# EAGLE board Robot_Psoc (EAGLE 7.6.0)
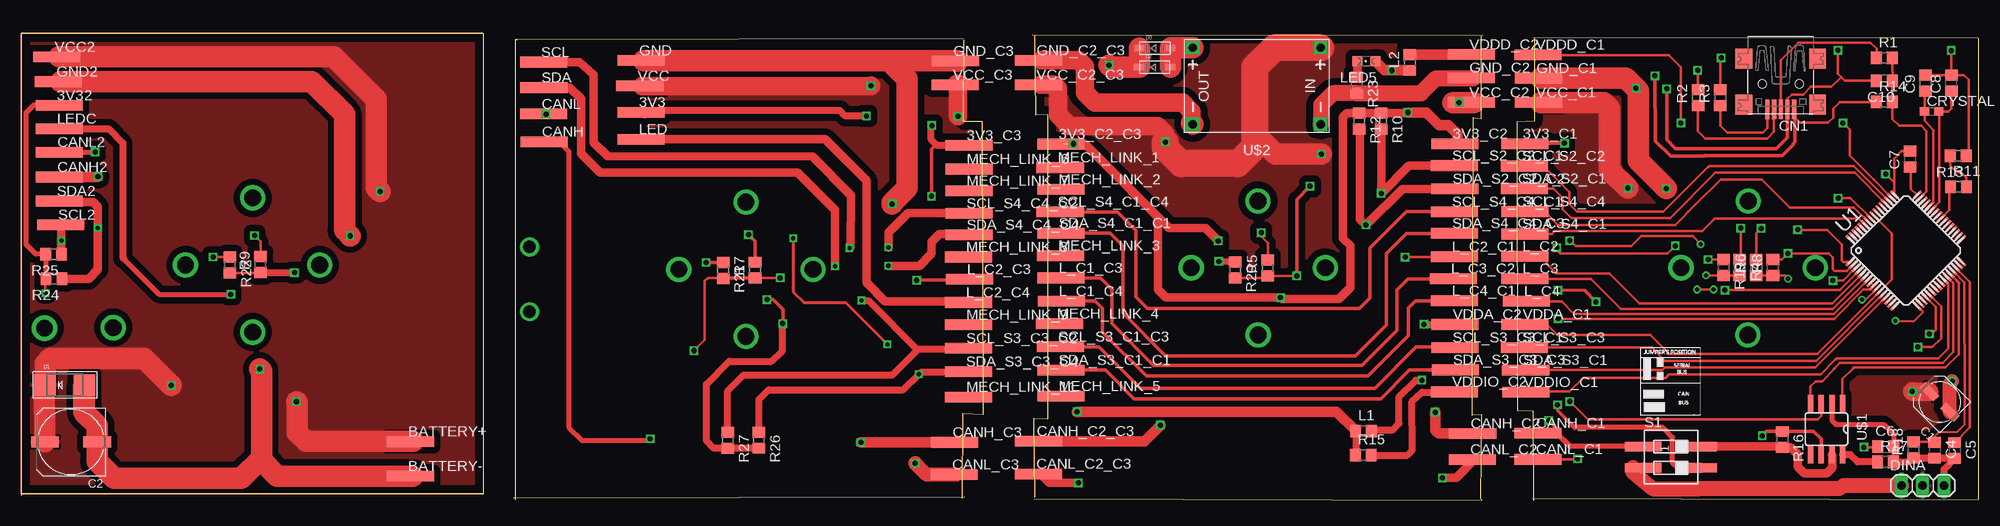
[diagram p0: board, top side]
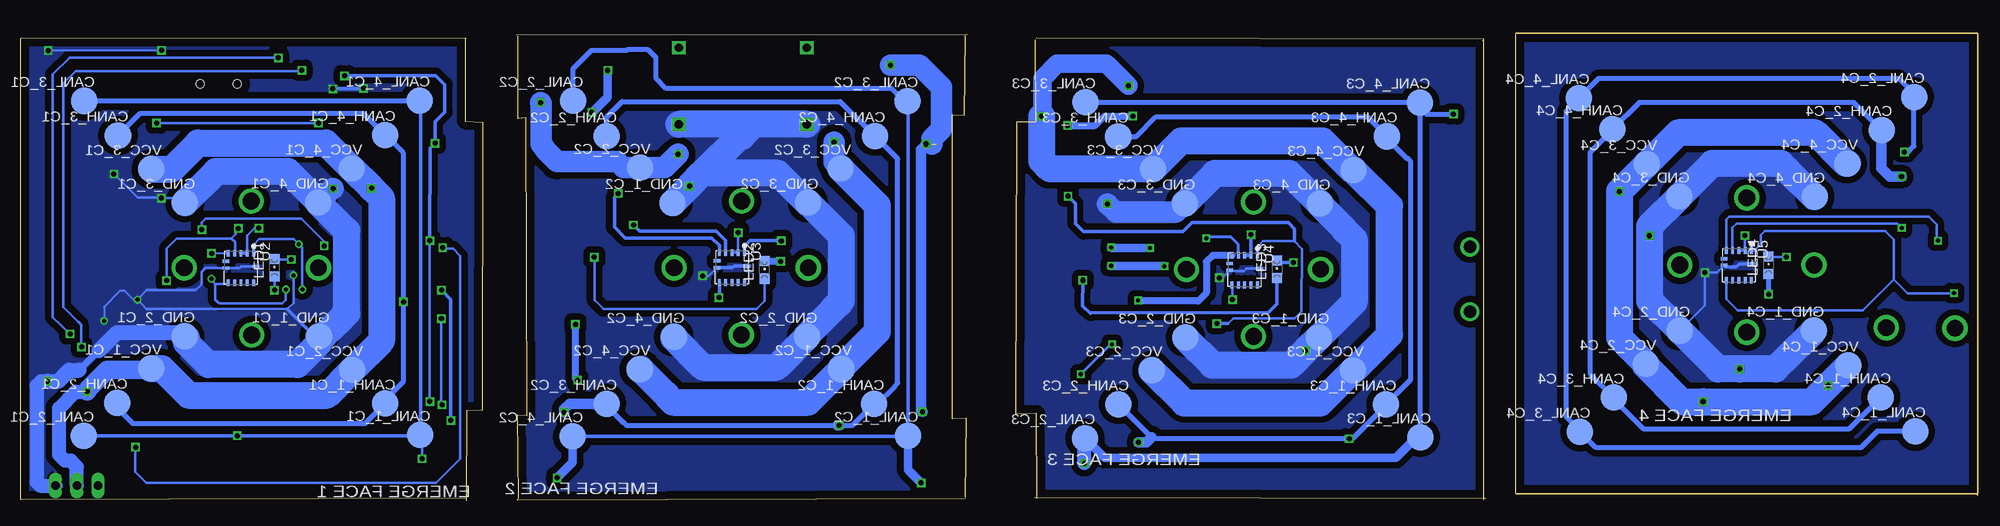
[diagram p1: board, bottom side, seen from below]

Size 233.48 x 55.82 mm. Coordinates in mm from the lower left corner, seen from the top.
Outline: 120.64,55.61 174.37,55.53
Outline: 112.44,55.01 112.4,45.25 114.65,45.24 114.75,10.31 112.3,10.39 112.28,0.29
Outline: 174.09,0.24 174.22,10.24 173.12,10.2 173.22,45.7 174.14,45.57 174.14,55.44
Outline: 120.84,55.49 120.94,46.04 122.4,46.1 122.4,9.76 120.75,9.84 120.86,0.38
Outline: 180.37,0 180.3,10.7 178.47,10.75 178.42,45.2 180.47,45.3 180.47,55.29
Outline: 0.01,0.55 0.01,55.55
Outline: 112.49,0.41 58.72,0.29
Outline: 112.33,55.19 58.97,55.08 58.97,0.08
Outline: 0,0.78 0,55.78
Outline: 233.37,55.26 180.34,55.2
Outline: 180.34,0.3 233.43,0.1
Outline: 233.48,0.17 233.48,55.17
Outline: 120.76,0.25 174.21,0.06 174.24,0.13
Outline: 59.12,54.99 59.01,54.99
Outline: 0.12,0.82 55.12,0.82 55.12,55.82 0.12,55.82
Outline: 55.01,0.82 0.01,0.82 0.01,55.82 55.01,55.82
Copper layers (1*16): Top 0.035mm / dielectric 1.5mm / Bottom 0.035mm
Design rules "default": minimum track width 10mil, minimum drill 24mil, track to track 8mil, track to pad 8mil, pad to pad 8mil, via to via 8mil, smd to smd 8mil, copper to edge 40mil, drill to drill 8mil, minimum pad ring 10mil, minimum via ring 8mil, stop-mask expansion 4mil, vias tented up to drill 0mil, thermal gap 10mil

## Footprints (pad centres in the part's own frame; a part is rotated, then mirrored left to right if it is on the bottom)
TP11R = smd 0.635 x 1.27: P$1 0.381,0; P$2 1.016,0; P$3 -0.254,0; P$4 -0.889,0; P$5 -1.524,0; P$6 1.613,0; P$7 2.21,0; P$8 -2.146,0; P$9 -2.769,0 | smd 1.1 x 1.1: TP 0,0
UD-5X5,8_NICHICON = smd 2.3 x 1: + 1.725,0; - -1.7,0
UD-8X10_NICHICON = smd 3.3 x 1.3: + 3.125,0; - -3.125,0
C0805 = smd 1.3 x 1.5: 1 -0.95,0; 2 0.95,0
B2,54 = smd 3.175 x 3.175 bottom: P$1 0,0 | smd 2.54 x 2.54 bottom: TP 0,0
USB-MINIB = smd 0.5 x 2.308: D+ 0,4.064; D- -0.8,4.064; GND 1.6,4.064; ID 0.8,4.064; VBUS -1.6,4.064 | smd 2 x 2.4: GND1 -4.4,-2; GND2 -4.4,3.5; GND3 4.4,3.5; GND4 4.4,-2 | hole 1: -2.2,1; 2.2,1
C0603 = smd 1.1 x 1: 1 -0.85,0; 2 0.85,0
SMADIODE = smd 2.54 x 2.54: A 2.349,0; C -2.349,0
SOD-123 = smd 1.2 x 0.7: A 1.85,0; C -1.85,0
1X03 = drill 1.016 long: 1 -2.54,0; 2 0,0; 3 2.54,0
R0805 = smd 1.3 x 1.5: 1 -0.95,0; 2 0.95,0
CHIPLED_0805 = smd 1.2 x 1.2: A 0,-1.05; C 0,1.05
SMS-002 = smd 1.092 x 2.007: 1 -1.27,-4.496; 2 1.27,-4.496; 3 1.27,4.496; 4 -1.27,4.496 | smd 1.143 x 2.54: P$1 -1.27,2.413; P$2 1.27,2.413; P$3 -1.27,-2.413; P$4 1.27,-2.413
TQFP64-10X10 = smd 1.2 x 0.3: 1 -5.7,3.75; 2 -5.7,3.25; 3 -5.7,2.75; 4 -5.7,2.25; 5 -5.7,1.75; 6 -5.7,1.25; 7 -5.7,0.75; 8 -5.7,0.25; 9 -5.7,-0.25; 10 -5.7,-0.75; 11 -5.7,-1.25; 12 -5.7,-1.75; 13 -5.7,-2.25; 14 -5.7,-2.75; 15 -5.7,-3.25; 16 -5.7,-3.75; 33 5.7,-3.75; 34 5.7,-3.25; 35 5.7,-2.75; 36 5.7,-2.25; 37 5.7,-1.75; 38 5.7,-1.25; 39 5.7,-0.75; 40 5.7,-0.25; 41 5.7,0.25; 42 5.7,0.75; 43 5.7,1.25; 44 5.7,1.75; 45 5.7,2.25; 46 5.7,2.75; 47 5.7,3.25; 48 5.7,3.75 | smd 0.3 x 1.2: 17 -3.75,-5.7; 18 -3.25,-5.7; 19 -2.75,-5.7; 20 -2.25,-5.7; 21 -1.75,-5.7; 22 -1.25,-5.7; 23 -0.75,-5.7; 24 -0.25,-5.7; 25 0.25,-5.7; 26 0.75,-5.7; 27 1.25,-5.7; 28 1.75,-5.7; 29 2.25,-5.7; 30 2.75,-5.7; 31 3.25,-5.7; 32 3.75,-5.7; 49 3.75,5.7; 50 3.25,5.7; 51 2.75,5.7; 52 2.25,5.7; 53 1.75,5.7; 54 1.25,5.7; 55 0.75,5.7; 56 0.25,5.7; 57 -0.25,5.7; 58 -0.75,5.7; 59 -1.25,5.7; 60 -1.75,5.7; 61 -2.25,5.7; 62 -2.75,5.7; 63 -3.25,5.7; 64 -3.75,5.7
XDCR_VCNL4010-GS08 = smd 0.805 x 0.35: 1 -1.772,1.5; 2 -1.772,0.75; 3 -1.772,0; 4 -1.772,-0.75; 5 -1.772,-1.5; 7 1.772,-1.5; 8 1.772,-0.75; 9 1.772,0; 10 1.772,0.75; 11 1.772,1.5 | smd 0.4 x 0.805: 6 -0.8,-1.772; 12 -0.175,1.772; 13 0,-1.772
SO8 = smd 0.66 x 2.032: 1 -1.905,-3.073; 2 -0.635,-3.073; 3 0.635,-3.073; 4 1.905,-3.073; 5 1.905,3.073; 6 0.635,3.073; 7 -0.635,3.073; 8 -1.905,3.073
DC-DC-STEP-DOWN-MP2307 = drill 1 pad 1.6 square: IN+ -7.62,-4.572; IN- -7.62,4.572; OUT+ 7.62,-4.572; OUT- 7.62,4.572

## Placement (x,y rotation side)
3V3  PTR1TP11R  [TP11R]  74.2,46.36 0 top
3V3_C1  PTR1TP11R  [TP11R]  179.65,42.6 0 top
3V3_C2  PTR1TP11R  [TP11R]  171.29,42.6 0 top
3V3_C2_C3  PTR1TP11R  [TP11R]  124.28,42.55 0 top
3V3_C3  PTR1TP11R  [TP11R]  113.3,42.39 0 top
3V32  PTR1TP11R  [TP11R]  4.77,47.17 0 top
BATTERY+  PTR1TP11R  [TP11R]  46.7,7.05 0 top
BATTERY-  PTR1TP11R  [TP11R]  46.68,2.91 0 top
C1  [UD-5X5,8_NICHICON]  228.85,11.76 135 top
C2  [UD-8X10_NICHICON]  5.91,7 180 top
C4  2200pF  [C0805]  228.24,6.02 270 top
C5  10nF  [C0805]  230.63,5.97 270 top
C6  1u  [C0805]  222.4,6.43 0 top
C7  1u  [C0805]  225.32,40.77 90 top
C8  36pF  [C0805]  230.25,49.84 90 top
C9  18pF  [C0805]  227.17,49.84 90 top
C10  0.1u  [C0805]  222.22,50.12 180 top
CANH  PTR1TP11R  [TP11R]  62.61,42.84 0 top
CANH2  PTR1TP11R  [TP11R]  4.79,38.61 0 top
CANH_1_C1  TPB2,54  [B2,54]  190.04,11.58 0 top
CANH_1_C2  TPB2,54  [B2,54]  131.73,11.53 0 top
CANH_1_C3  TPB2,54  [B2,54]  70.64,11.47 0 top
CANH_1_C4  TPB2,54  [B2,54]  11.62,12.33 0 top
CANH_2_C1  TPB2,54  [B2,54]  222,11.67 0 top
CANH_2_C2  TPB2,54  [B2,54]  163.62,43.48 0 top
CANH_2_C3  TPB2,54  [B2,54]  102.52,11.47 0 top
CANH_2_C4  TPB2,54  [B2,54]  11.48,44.25 0 top
CANH_3_C1  TPB2,54  [B2,54]  221.9,43.59 0 top
CANH_3_C2  TPB2,54  [B2,54]  163.62,11.55 0 top
CANH_3_C3  TPB2,54  [B2,54]  102.58,43.46 0 top
CANH_3_C4  TPB2,54  [B2,54]  43.44,12.3 0 top
CANH_4_C1  TPB2,54  [B2,54]  190.01,43.65 0 top
CANH_4_C2  TPB2,54  [B2,54]  131.6,43.52 0 top
CANH_4_C3  TPB2,54  [B2,54]  70.51,43.48 0 top
CANH_4_C4  TPB2,54  [B2,54]  43.61,44.33 0 top
CANH_C1  PTR1TP11R  [TP11R]  181.2,8.06 0 top
CANH_C2  PTR1TP11R  [TP11R]  173.4,8 0 top
CANH_C2_C3  PTR1TP11R  [TP11R]  121.64,7.09 0 top
CANH_C3  PTR1TP11R  [TP11R]  111.59,6.95 0 top
CANL  PTR1TP11R  [TP11R]  62.57,46.14 0 top
CANL2  PTR1TP11R  [TP11R]  4.8,41.59 0 top
CANL_1_C1  TPB2,54  [B2,54]  185.87,7.83 0 top
CANL_1_C2  TPB2,54  [B2,54]  127.66,7.73 0 top
CANL_1_C3  TPB2,54  [B2,54]  66.5,7.56 0 top
CANL_1_C4  TPB2,54  [B2,54]  7.48,8.27 0 top
CANL_2_C1  TPB2,54  [B2,54]  225.99,7.74 0 top
CANL_2_C2  TPB2,54  [B2,54]  167.63,47.73 0 top
CANL_2_C3  TPB2,54  [B2,54]  106.56,7.45 0 top
CANL_2_C4  TPB2,54  [B2,54]  7.6,48.19 0 top
CANL_3_C1  TPB2,54  [B2,54]  225.91,47.72 0 top
CANL_3_C2  TPB2,54  [B2,54]  127.68,47.68 0 top
CANL_3_C3  TPB2,54  [B2,54]  106.49,47.55 0 top
CANL_3_C4  TPB2,54  [B2,54]  47.48,8.21 0 top
CANL_4_C1  TPB2,54  [B2,54]  185.92,47.77 0 top
CANL_4_C2  TPB2,54  [B2,54]  167.65,7.66 0 top
CANL_4_C3  TPB2,54  [B2,54]  66.6,47.52 0 top
CANL_4_C4  TPB2,54  [B2,54]  47.6,48.06 0 top
CANL_C1  PTR1TP11R  [TP11R]  181.2,4.93 0 top
CANL_C2  PTR1TP11R  [TP11R]  173.35,4.91 0 top
CANL_C2_C3  PTR1TP11R  [TP11R]  121.59,3.18 0 top
CANL_C3  PTR1TP11R  [TP11R]  111.54,3.11 0 top
CN1  [USB-MINIB]  209.88,50.75 180 top
CRYSTAL  32.768kHz  [C0603]  227.88,46.46 0 top
D1  [SMADIODE]  5.17,13.8 0 top
D2  [SOD-123]  135.2,51.73 0 top
D3  [SOD-123]  135.23,54 0 top
DINA  [1X03]  226.82,1.78 0 top
GND  PTR1TP11R  [TP11R]  74.2,52.54 0 top
GND2  PTR1TP11R  [TP11R]  4.69,50.02 0 top
GND_1_C1  TPB2,54  [B2,54]  197.91,19.6 0 top
GND_1_C2  TPB2,54  [B2,54]  155.74,35.54 0 top
GND_1_C3  TPB2,54  [B2,54]  78.63,19.48 0 top
GND_1_C4  TPB2,54  [B2,54]  19.6,20.3 0 top
GND_2_C1  TPB2,54  [B2,54]  213.97,19.62 0 top
GND_2_C2  TPB2,54  [B2,54]  139.71,19.57 0 top
GND_2_C3  TPB2,54  [B2,54]  94.54,19.47 0 top
GND_2_C4  TPB2,54  [B2,54]  35.59,20.28 0 top
GND_3_C1  TPB2,54  [B2,54]  213.93,35.56 0 top
GND_3_C2  TPB2,54  [B2,54]  139.58,35.56 0 top
GND_3_C3  TPB2,54  [B2,54]  94.63,35.46 0 top
GND_3_C4  TPB2,54  [B2,54]  35.64,36.3 0 top
GND_4_C1  TPB2,54  [B2,54]  198.01,35.6 0 top
GND_4_C2  TPB2,54  [B2,54]  155.56,19.55 0 top
GND_4_C3  TPB2,54  [B2,54]  78.5,35.46 0 top
GND_4_C4  TPB2,54  [B2,54]  19.49,36.27 0 top
GND_C1  PTR1TP11R  [TP11R]  181.25,50.42 0 top
GND_C2  PTR1TP11R  [TP11R]  173.25,50.47 0 top
GND_C2_C3  PTR1TP11R  [TP11R]  121.61,52.56 0 top
GND_C3  PTR1TP11R  [TP11R]  111.69,52.47 0 top
L1  330-600Ohm@1Mhz  [R0805]  160.12,8.31 0 top
L2  330-600Ohm@1Mhz  [R0805]  165.63,52.3 90 top
L_C1_C3  PTR1TP11R  [TP11R]  124.3,26.57 0 top
L_C1_C4  PTR1TP11R  [TP11R]  124.33,23.8 0 top
L_C2  PTR1TP11R  [TP11R]  179.62,29.16 0 top
L_C2_C1  PTR1TP11R  [TP11R]  171.22,29.11 0 top
L_C2_C3  PTR1TP11R  [TP11R]  113.37,26.41 0 top
L_C2_C4  PTR1TP11R  [TP11R]  113.25,23.65 0 top
L_C3  PTR1TP11R  [TP11R]  179.65,26.5 0 top
L_C3_C2  PTR1TP11R  [TP11R]  171.12,26.5 0 top
L_C4  PTR1TP11R  [TP11R]  179.82,23.8 0 top
L_C4_C1  PTR1TP11R  [TP11R]  171.22,23.85 0 top
LED  PTR1TP11R  [TP11R]  74.2,43.14 0 top
LED1  [CHIPLED_0805]  203.22,27.79 0 bottom
LED2  [CHIPLED_0805]  144.78,27.54 0 bottom
LED3  [CHIPLED_0805]  83.63,27.61 0 bottom
LED4  [CHIPLED_0805]  25.01,28.11 0 bottom
LED5  [CHIPLED_0805]  160.45,52.45 90 top
LEDC  PTR1TP11R  [TP11R]  4.8,44.39 0 top
MECH_LINK_1  PTR1TP11R  [TP11R]  124.2,39.75 0 top
MECH_LINK_2  PTR1TP11R  [TP11R]  124.28,37.14 0 top
MECH_LINK_3  PTR1TP11R  [TP11R]  124.25,29.24 0 top
MECH_LINK_4  PTR1TP11R  [TP11R]  124.1,21.11 0 top
MECH_LINK_5  PTR1TP11R  [TP11R]  124.3,12.45 0 top
MECH_LINK_6  PTR1TP11R  [TP11R]  113.32,39.57 0 top
MECH_LINK_7  PTR1TP11R  [TP11R]  113.3,36.98 0 top
MECH_LINK_8  PTR1TP11R  [TP11R]  113.25,29.08 0 top
MECH_LINK_9  PTR1TP11R  [TP11R]  113.27,20.98 0 top
MECH_LINK_11  PTR1TP11R  [TP11R]  113.27,12.37 0 top
R1  0  [R0805]  222.22,52.84 0 top
R2  0  [R0805]  200,48.09 90 top
R3  0  [R0805]  202.66,48.11 90 top
R4  220  [R0805]  204.97,27.84 270 top
R5  220  [R0805]  148.69,27.77 90 top
R6  4.7k  [R0805]  206.96,27.84 90 top
R7  220  [R0805]  87.52,27.51 90 top
R8  4.7k  [R0805]  208.94,27.84 90 top
R9  220  [R0805]  28.51,28.19 90 top
R10  4.7k  [R0805]  162.22,45.32 270 top
R11  0  [R0805]  231.09,37.47 0 top
R12  4.7k  [R0805]  159.59,45.28 270 top
R13  0  [R0805]  231.06,41.15 180 top
R14  4.7k  [R0805]  222.25,47.58 0 top
R15  0  [R0805]  160.07,5.43 0 top
R16  120  [R0805]  210.06,7.29 270 top
R17  10k  [R0805]  222.37,4.63 0 top
R18  0  [R0805]  225.73,6.05 90 top
R19  220  [R0805]  203.04,27.84 270 top
R20  220  [R0805]  144.78,27.54 270 top
R21  220  [R0805]  83.71,27.48 270 top
R22  220  [R0805]  24.88,28.11 270 top
R23  220  [R0805]  159.31,49.57 270 top
R24  4.7k  [R0805]  3.88,26.48 180 top
R25  4.7k  [R0805]  3.82,29.41 180 top
R26  4.7k  [R0805]  87.98,7.22 270 top
R27  4.7k  [R0805]  84.26,7.21 270 top
S1  SWS002  [SMS-002]  196.78,5.19 270 top
SCL  PTR1TP11R  [TP11R]  62.55,52.33 0 top
SCL2  PTR1TP11R  [TP11R]  4.94,32.93 0 top
SCL_S2_C2  PTR1TP11R  [TP11R]  179.57,39.93 0 top
SCL_S2_C2_C1  PTR1TP11R  [TP11R]  171.24,39.98 0 top
SCL_S3_C1_C3  PTR1TP11R  [TP11R]  124.25,18.37 0 top
SCL_S3_C3  PTR1TP11R  [TP11R]  179.6,18.27 0 top
SCL_S3_C3_C1  PTR1TP11R  [TP11R]  171.29,18.27 0 top
SCL_S3_C3_C2  PTR1TP11R  [TP11R]  113.27,18.19 0 top
SCL_S4_C1_C4  PTR1TP11R  [TP11R]  124.2,34.47 0 top
SCL_S4_C4  PTR1TP11R  [TP11R]  179.62,34.5 0 top
SCL_S4_C4_C1  PTR1TP11R  [TP11R]  171.22,34.47 0 top
SCL_S4_C4_C2  PTR1TP11R  [TP11R]  113.3,34.29 0 top
SDA  PTR1TP11R  [TP11R]  62.6,49.3 0 top
SDA2  PTR1TP11R  [TP11R]  4.79,35.75 0 top
SDA_S2_C1  PTR1TP11R  [TP11R]  179.57,37.24 0 top
SDA_S2_C2_C2  PTR1TP11R  [TP11R]  171.29,37.21 0 top
SDA_S3_C1  PTR1TP11R  [TP11R]  179.72,15.57 0 top
SDA_S3_C1_C1  PTR1TP11R  [TP11R]  124.28,15.57 0 top
SDA_S3_C3_C3  PTR1TP11R  [TP11R]  171.34,15.6 0 top
SDA_S3_C3_C4  PTR1TP11R  [TP11R]  113.25,15.39 0 top
SDA_S4_C1  PTR1TP11R  [TP11R]  179.61,31.83 0 top
SDA_S4_C1_C1  PTR1TP11R  [TP11R]  124.3,31.93 0 top
SDA_S4_C4_C3  PTR1TP11R  [TP11R]  171.24,31.91 0 top
SDA_S4_C4_C4  PTR1TP11R  [TP11R]  113.32,31.72 0 top
U1  CY8C4247AZI-M485  [TQFP64-10X10]  224.81,29.85 45 top
U2  VCNL4010-GS08  [XDCR_VCNL4010-GS08]  207.23,27.77 270 bottom
U3  VCNL4010-GS08  [XDCR_VCNL4010-GS08]  148.66,27.82 270 bottom
U4  VCNL4010-GS08  [XDCR_VCNL4010-GS08]  87.49,27.51 270 bottom
U5  VCNL4010-GS08  [XDCR_VCNL4010-GS08]  28.54,28.09 270 bottom
U$1  SN65HVD230/1  [SO8]  215.34,8.54 180 top
U$2  DC-DC-STEP-DOWN-MP2307  [DC-DC-STEP-DOWN-MP2307]  147.37,49.49 180 top
VCC  PTR1TP11R  [TP11R]  74.05,49.5 0 top
VCC2  PTR1TP11R  [TP11R]  4.5,52.96 0 top
VCC_1_C1  TPB2,54  [B2,54]  217.94,15.77 0 top
VCC_1_C2  TPB2,54  [B2,54]  135.61,15.69 0 top
VCC_1_C3  TPB2,54  [B2,54]  74.56,15.54 0 top
VCC_1_C4  TPB2,54  [B2,54]  15.5,16.13 0 top
VCC_2_C1  TPB2,54  [B2,54]  193.94,15.6 0 top
VCC_2_C2  TPB2,54  [B2,54]  159.62,39.73 0 top
VCC_2_C3  TPB2,54  [B2,54]  98.56,15.55 0 top
VCC_2_C4  TPB2,54  [B2,54]  39.64,16.31 0 top
VCC_3_C1  TPB2,54  [B2,54]  217.94,39.59 0 top
VCC_3_C2  TPB2,54  [B2,54]  135.69,39.64 0 top
VCC_3_C3  TPB2,54  [B2,54]  98.43,39.59 0 top
VCC_3_C4  TPB2,54  [B2,54]  39.53,40.18 0 top
VCC_4_C1  TPB2,54  [B2,54]  194.01,39.64 0 top
VCC_4_C2  TPB2,54  [B2,54]  159.65,15.67 0 top
VCC_4_C3  TPB2,54  [B2,54]  74.5,39.47 0 top
VCC_4_C4  TPB2,54  [B2,54]  15.58,40.24 0 top
VCC_C1  PTR1TP11R  [TP11R]  181.25,47.53 0 top
VCC_C2  PTR1TP11R  [TP11R]  173.27,47.53 0 top
VCC_C2_C3  PTR1TP11R  [TP11R]  121.61,49.64 0 top
VCC_C3  PTR1TP11R  [TP11R]  111.66,49.62 0 top
VDDA_C1  PTR1TP11R  [TP11R]  179.63,21.03 0 top
VDDA_C2  PTR1TP11R  [TP11R]  171.29,21.03 0 top
VDDD_C1  PTR1TP11R  [TP11R]  181.2,53.22 0 top
VDDD_C2  PTR1TP11R  [TP11R]  173.27,53.24 0 top
VDDIO_C1  PTR1TP11R  [TP11R]  179.75,12.93 0 top
VDDIO_C2  PTR1TP11R  [TP11R]  171.22,12.98 0 top

## Library data of the parts
3V3 3V3_C1 3V3_C2 3V3_C2_C3 3V3_C3 3V32 BATTERY+ BATTERY- CANH CANH2 CANH_1_C1-CANH_1_C4 CANH_2_C1-CANH_2_C4 CANH_3_C1-CANH_3_C4 CANH_4_C1-CANH_4_C4 CANH_C1 CANH_C2 CANH_C2_C3 CANH_C3 CANL CANL2 CANL_1_C1-CANL_1_C4 CANL_2_C1-CANL_2_C4 CANL_3_C1-CANL_3_C4 CANL_4_C1-CANL_4_C4 CANL_C1 CANL_C2 CANL_C2_C3 CANL_C3 GND GND2 GND_1_C1-GND_1_C4 GND_2_C1-GND_2_C4 GND_3_C1-GND_3_C4 GND_4_C1-GND_4_C4 GND_C1 GND_C2 GND_C2_C3 GND_C3 L_C1_C3 L_C1_C4 L_C2 L_C2_C1 L_C2_C3 L_C2_C4 L_C3 L_C3_C2 L_C4 L_C4_C1 LED LEDC MECH_LINK_1-MECH_LINK_9 MECH_LINK_11 SCL SCL2 SCL_S2_C2 SCL_S2_C2_C1 SCL_S3_C1_C3 SCL_S3_C3 SCL_S3_C3_C1 SCL_S3_C3_C2 SCL_S4_C1_C4 SCL_S4_C4 SCL_S4_C4_C1 SCL_S4_C4_C2 SDA SDA2 SDA_S2_C1 SDA_S2_C2_C2 SDA_S3_C1 SDA_S3_C1_C1 SDA_S3_C3_C3 SDA_S3_C3_C4 SDA_S4_C1 SDA_S4_C1_C1 SDA_S4_C4_C3 SDA_S4_C4_C4 VCC VCC2 VCC_1_C1-VCC_1_C4 VCC_2_C1-VCC_2_C4 VCC_3_C1-VCC_3_C4 VCC_4_C1-VCC_4_C4 VCC_C1 VCC_C2 VCC_C2_C3 VCC_C3 VDDA_C1 VDDA_C2 VDDD_C1 VDDD_C2 VDDIO_C1 VDDIO_C2 = testpad
C1 C2 C4-C10 CRYSTAL L1 L2 R1-R27 = rcl
CN1 D1-D3 LED1-LED5 = adafruit
DINA = pinhead
S1 = smd-special
U1 = CypressPSoC
U2-U5 = VCNL4010-GS08
U$1 = texas_instruments
U$2 = diy-modules

## Nets
3V3_C1: 3V3_C1.TP CN1.VBUS R6.1 R8.1 R14.1 U2.1 U2.7 U$1.3
3V3_C2: 3V3_C2.TP 3V3_C2_C3.TP D2.C D3.C L1.1 L2.1 LED5.A R10.1 R12.1 R15.1 U3.1 U3.7
3V3_C3: 3V3.TP 3V3_C3.TP R26.2 R27.2 U4.1 U4.7
3V3_C4: 3V32.TP R24.2 R25.2 U5.1 U5.7
CAN_RX: U1.27 U$1.4
CAN_TX: U1.28 U$1.1
CANH: CANH_1_C1.TP CANH_2_C1.TP CANH_3_C1.TP CANH_4_C1.TP CANH_C1.TP S1.1
CANH_C3: CANH.TP CANH_1_C3.TP CANH_2_C3.TP CANH_3_C3.TP CANH_4_C3.TP CANH_C3.TP
CANH_C4: CANH2.TP CANH_1_C4.TP CANH_2_C4.TP CANH_3_C4.TP CANH_4_C4.TP
CANL: CANL_1_C1.TP CANL_2_C1.TP CANL_3_C1.TP CANL_4_C1.TP CANL_C1.TP R16.1 U$1.6
CANL_C3: CANL.TP CANL_1_C3.TP CANL_2_C3.TP CANL_3_C3.TP CANL_4_C3.TP CANL_C3.TP
CANL_C4: CANL2.TP CANL_1_C4.TP CANL_2_C4.TP CANL_3_C4.TP CANL_4_C4.TP
CMOD: C4.1 R18.2 U1.29
CTANK: C5.1 U1.30
DN_1: DINA.1 S1.2
GND3: GND.TP GND_1_C3.TP GND_2_C3.TP GND_3_C3.TP GND_4_C3.TP GND_C3.TP R7.1 R21.2 U4.12 U4.13
GND4: BATTERY-.TP C2.- D1.A GND2.TP GND_1_C4.TP GND_2_C4.TP GND_3_C4.TP GND_4_C4.TP R9.1 R22.2 U5.12 U5.13
GND_C1: C1.- C4.2 C5.2 C6.2 C7.2 C8.2 C9.2 C10.2 CN1.D- DINA.3 GND_1_C1.TP GND_2_C1.TP GND_3_C1.TP GND_4_C1.TP GND_C1.TP R4.2 R13.1 R17.2 R18.1 R19.2 U1.10 U1.17 U1.49 U1.57 U2.12 U2.13 U$1.2
GND_C2: GND_1_C2.TP GND_2_C2.TP GND_3_C2.TP GND_4_C2.TP GND_C2.TP GND_C2_C3.TP R5.1 R20.2 R23.2 U3.12 U3.13 U$2.IN- U$2.OUT-
LED_S1: LED1.A U1.4
LED_S2: L_C2.TP U1.5
LED_S2_C2: L_C2_C1.TP LED2.A
LED_S3: L_C3.TP U1.6
LED_S3_C3: L_C2_C3.TP LED3.A
LED_S4: L_C4.TP U1.7
LED_S4_C4: LED4.A LEDC.TP
LED_T_S4: L_C2_C4.TP LED.TP
MOTOR: S1.3 U1.8 U1.9
N$1: CN1.D+ R1.1
N$2: CN1.ID R2.1
N$3: CN1.GND R3.1
N$4: R11.2 R13.2
N$5: R16.2 S1.4 U$1.7
N$7: CANH_1_C2.TP CANH_2_C2.TP CANH_3_C2.TP CANH_4_C2.TP CANH_C2.TP CANH_C2_C3.TP
N$8: R7.2 U4.2 U4.3
N$9: R17.1 U$1.8
N$10: SDA_S3_C1_C1.TP SDA_S3_C3_C3.TP
N$14: LED1.C R19.1
N$15: LED2.C R20.1
N$16: LED3.C R21.1
N$17: LED4.C R22.1
N$18: LED5.C R23.1
N$20: L_C1_C4.TP L_C4_C1.TP
N$21: R4.1 U2.2 U2.3
N$22: L_C1_C3.TP L_C3_C2.TP
N$24: D2.A D3.A U$2.OUT+
N$26: SCL_S3_C1_C3.TP SCL_S3_C3_C1.TP
N$27: SCL_S4_C1_C4.TP SCL_S4_C4_C1.TP
N$32: CANL_1_C2.TP CANL_2_C2.TP CANL_3_C2.TP CANL_4_C2.TP CANL_C2.TP CANL_C2_C3.TP
N$43: R5.2 U3.2 U3.3
N$44: SDA_S4_C1_C1.TP SDA_S4_C4_C3.TP
N$46: R9.2 U5.2 U5.3
P0_1: R11.1 U1.40
P0_4: C8.1 CRYSTAL.2 U1.43
P0_5: C9.1 CRYSTAL.1 U1.44
SAR_BY: C6.1 U1.1
SCL_S1: R8.2 U1.2 U2.5
SCL_S2: SCL_S2_C2.TP U1.51
SCL_S2_U: R10.2 SCL_S2_C2_C1.TP U3.5
SCL_S3: SCL_S3_C3.TP U1.12
SCL_S3_U: R27.1 SCL_S3_C3_C2.TP U4.5
SCL_S4: SCL_S4_C4.TP U1.58
SCL_S4_U: SCL.TP SCL_S4_C4_C2.TP
SCL_S4_U_1: R25.1 SCL2.TP U5.5
SDA_S1: R6.2 U1.3 U2.4
SDA_S2: SDA_S2_C1.TP U1.52
SDA_S2_U: R12.2 SDA_S2_C2_C2.TP U3.4
SDA_S3: SDA_S3_C1.TP U1.13
SDA_S3_U: R26.1 SDA_S3_C3_C4.TP U4.4
SDA_S4: SDA_S4_C1.TP U1.59
SDA_S4_U: SDA.TP SDA_S4_C4_C4.TP
SDA_S4_U_1: R24.1 SDA2.TP U5.4
SWDCLK: R2.2 U1.21
SWDIO: R3.2 U1.20
UART_RX: U1.37
UART_TX: U1.38
VCC_C2: U$2.IN+ VCC_1_C2.TP VCC_2_C2.TP VCC_3_C2.TP VCC_4_C2.TP VCC_C2.TP VCC_C2_C3.TP
VCC_C3: VCC.TP VCC_1_C3.TP VCC_2_C3.TP VCC_3_C3.TP VCC_4_C3.TP VCC_C3.TP
VCC_C4: BATTERY+.TP C2.+ D1.C VCC2.TP VCC_1_C4.TP VCC_2_C4.TP VCC_3_C4.TP VCC_4_C4.TP
VCCC: C1.+ DINA.2 VCC_1_C1.TP VCC_2_C1.TP VCC_3_C1.TP VCC_4_C1.TP VCC_C1.TP
VCCD: C7.1 U1.48
VDDA: U1.11 U1.56 VDDA_C1.TP
VDDA2: L1.2 VDDA_C2.TP
VDDD: U1.50 VDDD_C1.TP
VDDD2: L2.2 VDDD_C2.TP
VDDIO: U1.26 VDDIO_C1.TP
VDDIO2: R15.2 VDDIO_C2.TP
XRES: C10.1 R1.2 R14.2 U1.47

## Tracks (layer width: path | path; a pad name or v marks a point on that pad's centre or on a via)
3V3_C1  (via drill 0.5, 0.6)
  Top 0.27: R8.1 210.36,26.89 v210.75,26.49 | v199.9,25.2 v201.87,25.2
  Top 0.305: 221.31,47.57 R14.1 216.94,47.58 216.14,46.79 216.14,45.73 215.51,45.1 212.18,45.1 211.54,45.74 | R6.1 R8.1 | v184.08,42.67 182.35,42.67 182.33,42.66 | U$1.3 214.7,10.12 214.28,9.69 186.88,9.68 v184.7,11.82 | v184.71,31.03 184.68,31.09 184.71,31.09 185.41,30.39 192.08,30.39 193.25,31.56 199.36,31.56 v200.34,30.59
  Top 0.406: 221.33,47.54 R14.1 | CN1.VBUS 211.54,46.62 211.54,45.74 211.54,42.77 211.41,42.63 211.41,42.5 210.08,41.17 200.79,41.17 200.74,41.13 196.78,41.13 194.91,42.9 v194.87,50.71
  Top 0.5: v184.08,42.67 182.33,42.66 179.48,42.61 3V3_C1.TP
  Bottom 0.27: v210.75,26.49 210.75,26.32 210.29,25.85 | 210.29,25.85 208.88,25.85 U2.7 | U2.1 205.74,30.51 205.04,31.21 200.96,31.21 | 200.96,31.21 199.93,30.19 199.93,25.49 v199.9,25.2 | v201.87,25.2 201.88,23.93 202.3,23.52 209.75,23.52 210.29,23.93 210.29,25.85 | 200.96,31.21 v200.34,30.59
  Bottom 0.305: 184.67,42.08 v184.08,42.67 | v184.7,11.82 184.69,30.49 v184.71,31.03
  Bottom 0.406: v184.71,31.03 184.67,42.08 | v184.08,42.67 184.08,45.22 182.93,46.37 182.93,49.66 184.02,50.75 v194.87,50.71
3V3_C2  (via drill 0.6)  (1 unrouted)
  Top 0.813: L1.1 159.17,5.34 R15.1
  Top 1.016: 135.58,33.84 135.58,25.18 136.52,24.24 v150.21,24.24 150.35,24.09 157.19,24.09 158.52,25.42 158.52,30.46 157.66,31.31 157.66,45.75 158.15,46.23 R12.1 162.19,46.23 R10.1 165.31,46.27 v165.39,46.34 | 135.58,33.84 133.17,36.25 | 135.58,33.84 136.9,32.52 141.25,32.52 v142.77,30.99 | 125.82,42.55 126.87,42.55 133.17,36.25 | 133.17,36.25 133.13,36.25 132.5,36.88 132.45,36.88 132.4,36.93
  Top 1.27: 3V3_C2.TP 171.29,43.75 170.22,44.82 169.11,44.82 167.63,46.3 165.45,46.3 v165.39,46.34 | L2.1 v163.48,51.35 162.6,51.35 LED5.A | L1.1 156.88,10.6 v125.93,10.6 | v125.49,42.59 125.82,42.55
  Top 2.54: D3.C 133.38,51.76 D2.C 130.04,51.73 v129.76,52.01
  Bottom 0.406: U3.7 150.16,24.28 v150.21,24.24 | U3.1 147.16,30.36 146.48,31.04 142.82,31.04 v142.77,30.99
  Bottom 1.016: v165.39,46.34 165.26,46.39 163.48,48.17 v163.48,51.35
  Bottom 1.27: v125.93,10.6 126.1,10.77 126.1,41.87 125.42,42.55 124.78,42.55 v125.49,42.59
  Bottom 2.54: 124.78,42.55 124.78,43.19 123.64,44.34 123.64,49.38 126.26,52.01 v129.76,52.01
3V3_C3  (via drill 0.6)
  Top 0.406: v88.94,23.98 89.67,23.98 90.84,22.82 90.84,21.15 v90.81,21.12 | v108.56,36.34 108.56,41.95 109.11,42.5
  Top 0.813: R26.2 R27.2 | R26.2 82.59,6.27 81.72,7.14 81.72,13.9 84.42,16.64 89.48,16.64 90.78,17.89 90.78,20.68 v90.81,21.12 | 87.75,6.04 R26.2 | 3V3_C3.TP 109.22,42.39 109.11,42.5 108.52,43.09 108.52,44.69 v108.61,44.78 | v100.82,45.92 98.27,45.92 97.63,46.56 74.4,46.56 3V3.TP
  Top 1.27: 74.34,46.23 3V3.TP
  Bottom 0.305: U4.1 85.99,30.28 85.31,30.96 81.55,30.96 80.67,30.05 80.71,23.02 80.71,22.58 81.56,21.74 88.86,21.74 89.47,21.12 | v88.94,23.98 88.94,25.68 U4.7
  Bottom 0.406: 81.55,30.96 81.55,32.43 82.3,33.18 93.76,33.18 94.85,32.09 106.7,32.09 107.7,33.1 107.7,35.47 v108.56,36.34 | v90.81,21.12 89.47,21.12
  Bottom 0.813: v108.61,44.78 105.33,44.78 104.24,45.87 100.86,45.87 v100.82,45.92
3V3_C4  (via drill 0.5)
  Top 0.305: v2.87,24.77 2.87,26.42 R24.2
  Top 0.61: 2.87,26.54 R25.2 1.73,29.41 0.55,30.59 0.55,46.3 1.5,47.25 4.7,47.25
  Top 1.016: 2.87,26.54 R24.2 | 4.7,47.25 3V32.TP
  Bottom 0.305: U5.1 26.66,29.86 25.91,30.61 25.91,31.69 25.44,32.17 11.06,32.17 10.04,31.15 10.04,26.41 | 10.04,26.41 8.36,24.73 2.9,24.73 v2.87,24.77 | U5.7 30.04,24.08 28.66,22.7 13.76,22.7 10.04,26.41
CAN_RX
  Top 0.27: 216.31,15.75 216.22,15.72 216.91,16.41 229.18,16.44 230.46,17.72 230.46,25.98 230.4,26.04
  Top 0.28: U$1.4 213.43,13.62 214.07,14.26 214.81,14.26 216.31,15.75
  Top 0.305: U1.27 229.73,26.66 229.78,26.66 230.4,26.04 | 213.51,11.69 U$1.4
CAN_TX
  Top 0.27: U$1.1 217.24,14.52 218.45,15.73 218.47,15.73 218.61,15.87 229.52,15.87 231.13,17.48 231.13,25.99 230.75,26.37
  Top 0.305: U1.28 230.75,26.37 231.16,25.96
CANH  (via drill 0.6)
  Top 0.406: S1.1 184.55,6.46 182.94,8.06 181.21,8.06 CANH_C1.TP | 183.13,8.08 183.13,8.63 v182.2,9.56 | v183.3,25.12 186.52,25.08 v187.83,23.72
  Top 0.61: S1.1 184.76,6.46 183.13,8.08
  Bottom 0.406: v182.2,9.56 182.2,24.02 v183.3,25.12
  Bottom 0.61: CANH_2_C1.TP 222,11.08 220.13,9.21 192.4,9.21 CANH_1_C1.TP 190.04,12.01 187.83,14.21 v187.83,23.72 187.83,41.47 CANH_4_C1.TP 190.05,43.65 192.59,46.19 219.3,46.19 CANH_3_C1.TP
CANH_C3  (via drill 0.6)
  Top 0.61: CANH.TP 64.15,42.84 65.3,41.68 65.3,8.75 66.87,7.17 74.82,7.17 v75.01,7.37
  Top 1.27: CANH_C3.TP v100.14,6.95
  Bottom 0.61: CANH_3_C3.TP 100.42,43.46 98.05,45.83 72.85,45.83 CANH_4_C3.TP 70.51,43.22 68.12,40.83 67.99,40.83 67.73,40.57 67.73,14.38 CANH_1_C3.TP 70.64,11.35 74.62,7.37 v75.01,7.37 98.42,7.37 98.61,7.56 CANH_2_C3.TP
  Bottom 1.27: v100.14,6.95 99.22,6.95 98.61,7.56
CANH_C4  (via drill 0.6)
  Top 1.27: CANH2.TP 9.04,38.61 v9.13,38.7
  Bottom 0.61: CANH_2_C4.TP 11.54,44.25 14.81,47.53 40.41,47.53 CANH_4_C4.TP 43.61,44.24 46.29,41.56 46.29,15.15 CANH_3_C4.TP 43.44,12.08 39.95,8.59 15.36,8.59 CANH_1_C4.TP
  Bottom 1.27: v9.13,38.7 10.55,38.7 11.53,39.68 11.53,44.2 CANH_2_C4.TP
CANL  (via drill 0.6)
  Top 0.305: CANL_C1.TP 185.59,4.93 v185.64,4.99
  Top 0.406: v207.68,7.74 208.17,8.24 R16.1 210.12,8.3 213.75,8.3 214.7,7.35 U$1.6
  Bottom 0.305: v185.64,4.99 185.64,6.9 186.12,7.39
  Bottom 0.406: CANL_2_C1.TP v207.68,7.74 186.48,7.74 | 186.48,7.74 185.81,8.41 | 185.81,8.41 185.81,7.89 CANL_1_C1.TP | 185.81,8.41 185.81,47.66 CANL_4_C1.TP | 185.69,6.96 186.12,7.39 186.48,7.74
  Bottom 0.61: CANL_3_C1.TP 185.97,47.72 CANL_4_C1.TP
CANL_C3  (via drill 0.6)
  Top 0.61: CANL.TP 63.94,46.14 64.02,46.23 62.66,46.23 CANL.TP
  Top 1.676: CANL_C3.TP 107.97,3.11 v106.62,4.45
  Bottom 0.61: CANL_3_C3.TP 66.63,47.55 CANL_4_C3.TP | CANL_4_C3.TP 66.6,7.65 CANL_1_C3.TP | 106.46,7.56 CANL_2_C3.TP | CANL_4_C3.TP 66.6,46.94 65.77,46.11 62.6,46.11 CANL.TP
  Bottom 1.016: CANL_1_C3.TP 67.01,7.56 69.43,5.13 104.24,5.13 CANL_2_C3.TP
  Bottom 1.676: v106.62,4.45 106.62,7.39 CANL_2_C3.TP
  other vias: 62.57,46.14
CANL_C4  (via drill 0.6)
  Top 0.61: CANL2.TP 8.74,41.59 v8.78,41.63
  Bottom 0.61: CANL_1_C4.TP 12.03,8.27 13.97,6.33 45.59,6.33 CANL_3_C4.TP 47.48,8.31 49.14,9.97 49.14,46.52 CANL_4_C4.TP 45.27,50.39 9.44,50.39 7.6,48.55 CANL_2_C4.TP 7.64,48.15 7.64,42.31 8.32,41.63 v8.78,41.63
CMOD
  Top 0.25: C4.1 228.24,7.67 228.79,8.21 230.94,8.21 231.85,9.12 231.85,11.45 231.83,11.47
  Top 0.305: U1.29 231.8,26.04 231.83,11.47 | 227.86,7 R18.2
  Top 0.813: 227.86,7 C4.1
CTANK
  Top 0.305: U1.30 232.46,26.09 232.46,8.73 C5.1
DN_1
  Top 1.778: DINA.1 217.38,1.78 216.82,1.41 200.16,1.41 199.99,1.42 194.58,1.42 192.29,3.34 S1.2
GND3  (via drill 0.6)
  Top 0.305: R7.1 90.48,26.56 v90.52,26.59 81.89,26.59 81.5,26.21 81.5,19.18 v80.22,17.9
  Top 0.406: R21.2 83.73,26.56 R7.1
  Top 2.54: GND.TP 103.51,52.54 | 103.51,52.54 111.62,52.54 GND_C3.TP | v103.87,35.42 103.87,35.52 105.65,37.29 105.65,50.4 103.51,52.54
  Bottom 0.305: U4.12 87.27,27.68 87.57,27.39 89.14,27.39 U4.13 90.18,26.59 v90.52,26.59 | v80.22,17.9 77.28,20.84
  Bottom 2.54: 82.17,39.06 91.03,39.06 95.67,34.42 102.87,34.42 v103.87,35.42
  Bottom 3.2: GND_2_C3.TP 94.54,19.36 91.36,16.18 81.94,16.18 v80.22,17.9 GND_1_C3.TP 77.28,20.84 74.42,23.69 74.42,31.17 75.54,32.28 75.54,32.35 78.5,35.31 GND_4_C3.TP 78.57,35.46 82.17,39.06 91.04,39.06 GND_3_C3.TP
  pour Bottom (isolate 0.762): 58.82,0.09 112.34,-0.08 112,10.16 114.61,10.39 114.71,45.21 112.58,45.25 112.23,55.15 58.69,55.35
GND4  (via drill 0.6)
  Top 0.305: R22.2 28.43,27.16 R9.1
  Top 0.813: R9.1 32.57,27.24 v32.58,27.22
  Top 2.54: C2.- 9.04,8.97 7.43,10.58 7.43,13.71 D1.A 7.52,10.46 9.02,8.96 9.02,4.68 11.04,2.66 26.24,2.66 28.65,5.07 | GND2.TP 34.62,50.02 38.54,46.11 38.54,32.27 v39.2,31.61 | BATTERY-.TP 30.53,2.91 28.65,4.8 28.65,5.07 | 28.65,5.07 28.65,15.48 v28.43,15.7
  Bottom 0.305: U5.13 31.17,27.22 v32.58,27.22 32.58,23.29 GND_2_C4.TP
  Bottom 0.406: U5.12 28.51,28.26 28.87,27.9 30.12,27.9 U5.13
  Bottom 3.2: GND_1_C4.TP 19.6,20.27 23.03,16.83 24.17,15.7 v28.43,15.7 31.01,15.7 GND_2_C4.TP 39.2,23.89 v39.2,31.61 39.2,32.75 GND_3_C4.TP | GND_3_C4.TP | GND_4_C4.TP 19.55,36.27 22.75,39.47 22.75,39.48 23.51,40.23 31.71,40.23 GND_3_C4.TP
  pour Bottom (isolate 0.762): -0.02,0.73 54.92,0.58 55.05,55.28 -0.02,55.34 -0.01,7.82
GND_C1  (via drill 0.5, 0.6)
  Top 0.25: U1.10 220.04,24.02 219.59,24.02 v219.57,24 | v223.56,21.45 225.82,21.45 226.86,22.49 226.86,22.5 U1.17
  Top 0.27: R4.2 201.29,26.89 v200.96,26.89
  Top 0.28: U1.49 223.43,40.85 224.27,41.69 225.29,41.69 C7.2
  Top 0.305: 225.73,5.02 R18.1 226.49,5.07 | R17.2 223.25,6.15 C6.2 | U1.17 | U1.10 | 228.42,5.02 C4.2 | R19.2 R4.2 | C9.2 C8.2 | C8.2 231.74,50.79 232.28,50.25 232.28,41.42 R13.1 | CN1.D- 210.68,47.97 211.18,48.47 212.55,48.47 213.46,49.39 215.91,49.39 217.09,50.57 | v216.71,53.75 216.67,53.68 216.67,50.99 217.09,50.57 | v230.22,53.72 230.22,50.81 C8.2 | C10.2 217.54,50.12 217.09,50.57 | U1.57 218.2,36.1 v216.73,36.1 | U1.49 223.43,37.95 v222.4,38.98
  Top 0.406: CN1.D- 210.68,43.36 209.36,42.04 197.33,42.04 196.28,43.09 v196.28,49.16 | v192.61,49.23 192.61,48.41 192.91,48.11
  Top 0.61: U$1.2 215.97,9.56 216.44,9.09 222.17,9.09 223.37,7.88 223.37,6.45 C6.2
  Top 0.813: 228.42,5.02 C5.2 229.36,3.75 DINA.3 | C4.2 226.49,5.07 | R17.2 225.08,4.6 R18.1
  Top 1.676: C1.- 230.05,13.97 v230.33,14.25
  Top 2.54: GND_C1.TP 191.41,50.42 v192.61,49.23 192.91,48.93 192.91,48.11 192.91,40.58 v196.23,37.25
  Bottom 0.25: v219.57,24 220.06,24 221.1,25.04 221.67,25.04 223.56,23.14 v223.56,21.45
  Bottom 0.27: U2.13 211.48,27.77 211.93,27.32 211.93,25.79 212.6,25.11 218.45,25.11 v219.57,24 218.51,22.85 201.69,22.85 200.96,23.58 v200.96,26.89
  Bottom 0.305: U2.13 207.39,27.77 207.21,27.94 U2.12 | v216.71,53.75 v230.22,53.72 | GND_3_C1.TP 214.47,36.1 v216.73,36.1 216.8,36.17 219.57,36.17 222.38,38.98 v222.4,38.98
  Bottom 0.406: GND_1_C1.TP 198.43,19.6 201.69,22.85 | v196.28,49.16 192.68,49.16 v192.61,49.23
  Bottom 0.813: 228.43,14.82 228.43,14.88 | 226.57,15.55 224.19,17.92 224.17,17.92
  Bottom 1.676: v230.33,14.25 231.07,14.25 231.62,13.69 231.62,2.19 231.2,1.77 229.37,1.77 DINA.3 | 214.42,20.07 GND_2_C1.TP
  Bottom 1.778: v230.33,14.25 229,14.25 228.43,14.82 | 228.43,14.88 227.77,15.55 226.57,15.55 | 224.17,17.92 222.01,20.07 214.42,20.07
  Bottom 2.54: v196.23,37.25 196.36,37.25 GND_4_C1.TP
  Bottom 3.2: GND_2_C1.TP 213.76,19.41 213.76,18.87 211.13,16.24 200.47,16.24 197.91,18.8 GND_1_C1.TP 197.39,19.6 195.76,21.23 194.62,22.38 194.62,32.21 GND_4_C1.TP 198.01,35.69 201.62,39.3 210.19,39.3 GND_3_C1.TP
  pour Bottom (isolate 0.762): 180.33,54.99 180.43,44.88 178.35,45 178.53,10.45 180.2,10.47 180.23,0.21 233.05,0.03 233.05,55.02
GND_C2  (via drill 0.6)
  Top 0.305: R20.2 148.46,26.59 R5.1 v152.14,26.82
  Top 0.406: v152.14,26.82 152.14,35.94 v153.74,37.54
  Top 1.93: GND_C2.TP 173.2,50.42 168.76,50.42 166.96,48.62 R23.2 156.44,48.62 155.04,47.22 155.04,44.96 U$2.IN-
  Top 2.184: GND_C2_C3.TP 126.12,52.56 126.86,51.81 126.86,48.7 128.08,47.48 138.56,47.48 139.58,46.46 139.58,45.08
  Top 2.54: 139.58,45.08 U$2.OUT-
  Bottom 0.305: v152.14,26.82 151.43,26.82 U3.13
  Bottom 0.406: U3.12 146.92,28.02 148.36,28.02 148.56,27.82 U3.13
  Bottom 3.2: GND_4_C2.TP 155.56,19.4 152.07,15.91 143.36,15.91 GND_2_C2.TP 139.71,19.7 136.6,22.81 136.6,22.87 135.61,23.86 135.61,31.6 GND_3_C2.TP 139.69,35.56 143.21,39.08 152.19,39.08 | 152.19,39.08 v153.74,37.54 GND_1_C2.TP | U$2.IN- U$2.OUT- 146.01,44.92 147.43,43.5 147.78,43.5 152.19,39.08
  pour Bottom (isolate 0.813): 120.92,0.57 174.17,0.18 174.25,10.38 173.15,10.36 173.24,45.84 174.11,45.73 174.02,55.49 120.77,55.41 120.95,46.13 122.29,45.81 122.18,9.93 120.82,9.89
LED_S1  (via drill 0.6)
  Top 0.305: v203.22,25.12 216.91,25.12 U1.4
  Bottom 0.305: LED1.A v203.22,25.12
LED_S2
  Top 0.305: U1.5 216.04,23.55 193.04,23.55 189.46,27.13 183.1,27.13 181.99,28.25 181.99,28.6 181.44,29.15 | 181.66,29.15 181.44,29.15 | 181.44,29.15 179.63,29.15 L_C2.TP
LED_S2_C2  (via drill 0.6)
  Top 0.305: v165.1,29.06 171.17,29.06 L_C2_C1.TP
  Bottom 0.305: LED2.A 144.78,23.83 145.72,22.89 163.98,22.89 165.02,23.93 165.02,28.99 v165.1,29.06
LED_S3
  Top 0.305: U1.6 216.08,22.89 190.79,22.89 187.24,26.44 181.23,26.44 181.2,26.47 179.67,26.47 L_C3.TP
LED_S3_C3  (via drill 0.6)
  Top 0.406: v106.8,26.31 113.27,26.31 L_C2_C3.TP
  Bottom 0.406: LED3.A 83.63,23.46 84.64,22.45 105.9,22.41 105.88,22.36 106.82,23.26 v106.8,26.31
LED_S4
  Top 0.305: U1.7 216.19,22.29 185.2,22.29 183.74,23.74 179.88,23.74 L_C4.TP
LED_S4_C4  (via drill 0.6)
  Top 0.61: 12.08,29 12.23,28.85 16.45,24.62 v24.98,24.62
  Top 0.813: LEDC.TP 10.39,44.39 12.08,42.69 12.08,28.99 12.23,28.85
  Bottom 0.61: v24.98,24.62 24.98,27.04 LED4.A
LED_T_S4
  Top 1.016: LED.TP 95.84,43.14 100.79,38.19 100.79,26.05 103.05,23.78 113.11,23.78 L_C2_C4.TP
MOTOR  (via drill 0.6)
  Top 0.305: U1.8 U1.9 220.51,25.2 219.73,25.2 216.24,21.7 183.34,21.7 v183.32,21.72
  Top 0.406: S1.3 199.31,3.92 | 185.34,8.68 185.05,8.97 183.28,10.73 v183.25,11.43
  Top 0.61: 199.31,3.92 197.52,3.92 196.96,4.47 196.96,7.58 195.82,8.72 185.29,8.72 185.05,8.97
  Bottom 0.305: v183.32,21.72 183.32,11.84 v183.25,11.43
N$1
  Top 0.305: CN1.D+ 209.88,52.57 211.98,54.68 220.59,54.68 221.32,53.95 221.32,52.88 R1.1
N$2
  Top 0.305: R2.1 200,44.1 200.86,43.23 208.25,43.23 209.04,44.02 209.04,46.65 CN1.ID
N$3
  Top 0.305: CN1.GND 208.28,44.48 207.72,43.92 203.53,43.92 202.69,44.76 202.69,47.14 R3.1
N$4
  Top 0.305: R13.2 230.11,39.97 230.86,39.22 231.37,39.22 232,38.59 232,37.5 R11.2
N$5
  Top 0.406: 216.02,5.52 U$1.7
  Top 1: S1.4 209.94,6.46 R16.2 211.08,6.34 211.89,5.52 211.89,4.05 212.7,3.24 215.34,3.24 216.01,3.9 216.01,5.43 U$1.7
N$6  (via drill 2)
  other vias: 206,35.77
N$7  (via drill 0.6)
  Top 1.27: CANH_C2.TP 169.07,8 168.67,8.41 v168.67,10.56 | CANH_C2_C3.TP 133.94,7.09 v135.86,9.01
  Bottom 0.61: CANH_2_C2.TP 163.62,45.78 161.74,47.65 135.74,47.65 CANH_4_C2.TP 128.89,40.8 128.89,14.02 129.16,13.75 129.16,13.71 131.33,11.53 CANH_1_C2.TP 134.25,9.01 v135.86,9.01 | CANH_3_C2.TP 163.62,11.29 161.65,9.33 161.6,9.33 161.28,9.01 136.04,9.01
  Bottom 1.27: v168.67,10.56 168.67,10.92 168.03,11.56 CANH_3_C2.TP | v135.86,9.01 136.04,9.01
N$8  (via drill 0.6)
  Top 0.406: R7.2 87.52,30.96 v86.73,31.75
  Bottom 0.406: U4.3 U4.2 v86.73,31.75
N$9
  Top 0.813: R17.1 219.05,4.63 218.18,5.46 U$1.8
N$10
  Top 0.406: SDA_S3_C1_C1.TP 129.31,15.57 132.71,12.17 162.18,12.17 165.58,15.57 171.32,15.57 SDA_S3_C3_C3.TP
N$11  (via drill 0.6)
  other vias: 212.06,49.74
N$12  (via drill 0.6)
  other vias: 207.67,49.74
N$13  (via drill 1.5)
  other vias: 60.62,30.28
N$14  (via drill 0.6)
  Top 0.305: R19.1 201.35,28.79 v201.21,28.78
  Bottom 0.305: v201.21,28.78 203.16,28.78 LED1.C
N$15  (via drill 0.6)
  Top 0.813: v142.85,28.55 144.69,28.58 R20.1
  Bottom 0.813: LED2.C 142.98,28.59 v142.85,28.55
N$16  (via drill 0.6)
  Top 0.406: R21.1 81.71,28.43 v81.67,28.42
  Bottom 0.406: v81.67,28.42 83.39,28.42 LED3.C
N$17  (via drill 0.6)
  Top 0.305: R22.1 22.86,29.06 v22.85,29.08
  Bottom 0.305: v22.85,29.08 24.92,29.08 LED4.C
N$18
  Top 1.016: LED5.C 159.4,50.62 R23.1
N$19  (via drill 1.5)
  other vias: 60.62,22.55
N$20
  Top 0.406: L_C1_C4.TP 128.09,23.8 128.98,22.91 128.98,20.1 134.21,14.86 160.6,14.86 165.45,19.71 165.45,22.99 166.29,23.83 171.19,23.83 L_C4_C1.TP
N$21  (via drill 0.6)
  Top 0.305: v205.1,32.52 205.1,28.84 R4.1
  Bottom 0.305: U2.2 206.49,31.64 205.63,32.49 205.13,32.49 v205.1,32.52
  Bottom 0.406: U2.2 U2.3
N$22
  Top 0.406: L_C1_C3.TP 128.72,26.57 130.09,25.2 130.09,21.14 135.07,16.16 159.94,16.16 164.08,20.3 164.08,25.15 165.38,26.45 171.06,26.45 L_C3_C2.TP
N$23  (via drill 2 pad 2.18)
  other vias: 213.99,27.79
N$24
  Top 2.54: U$2.OUT+ 137.14,54.06 D3.A 137.05,53.97 D2.A
N$25  (via drill 2 pad 2.18)
  other vias: 197.99,27.79
N$26
  Top 0.406: SCL_S3_C1_C3.TP 128.55,18.37 133.5,13.42 161.46,13.42 166.37,18.32 171.24,18.32 SCL_S3_C3_C1.TP
N$27
  Top 0.406: SCL_S4_C1_C4.TP 130.73,34.47 132.97,32.24 132.97,24.31 134.34,22.94 159.63,22.94 160.85,24.16 160.85,30.13 165.25,34.52 171.17,34.52 SCL_S4_C4_C1.TP
N$28  (via drill 2 pad 2.18)
  other vias: 205.96,19.79
N$29  (via drill 2)
  other vias: 2.75,20.58
N$30  (via drill 2 pad 2.18)
  other vias: 139.54,27.79
N$31  (via drill 2 pad 2.18)
  other vias: 147.49,35.77
N$32  (via drill 0.6)
  Top 1.016: CANL_C2.TP 171.16,2.72 v169.52,2.72 | CANL_C2_C3.TP 122.65,2.11 v126.1,2.11
  Bottom 0.406: CANL_4_C2.TP 127.73,7.66 CANL_1_C2.TP 127.66,47.66 CANL_3_C2.TP | 167.59,47.68 CANL_2_C2.TP
  Bottom 0.61: 167.59,47.68 167.6,47.7 167.6,51.57 165.41,53.76 161.2,53.76 161.15,53.81 158.64,53.81 157.73,52.9 157.73,50.44 156.5,49.2 129.62,49.2 128.1,47.68 CANL_3_C2.TP
  Bottom 1.016: v169.52,2.72 167.65,4.58 CANL_4_C2.TP | v126.1,2.11 127.66,3.68 CANL_1_C2.TP
N$33  (via drill 2 pad 2.18)
  other vias: 155.55,27.79
N$34  (via drill 2 pad 2.18)
  other vias: 147.54,19.79
N$35  (via drill 2)
  other vias: 78.42,27.61
N$36  (via drill 2)
  other vias: 86.42,35.63
N$37  (via drill 2)
  other vias: 94.43,27.61
N$38  (via drill 2)
  other vias: 86.42,19.61
N$39  (via drill 2)
  other vias: 19.57,28.14
N$40  (via drill 2)
  other vias: 27.57,36.14
N$41  (via drill 2)
  other vias: 35.57,28.14
N$42  (via drill 2)
  other vias: 27.57,20.11
N$43  (via drill 0.6)
  Top 0.305: R5.2 148.69,30.76 147.95,31.5 v147.92,31.98
  Bottom 0.305: v147.92,31.98 147.95,29.65 U3.2 U3.3
N$44
  Top 0.406: SDA_S4_C1_C1.TP 129.84,31.93 131.39,30.38 131.39,22.38 136.5,17.28 159.15,17.28 162.84,20.96 162.84,29.49 165.25,31.91 SDA_S4_C4_C3.TP
N$45  (via drill 2)
  other vias: 10.95,20.65
N$46  (via drill 0.6)
  Top 0.305: R9.2 28.51,30.93 v27.8,31.64
  Bottom 0.305: U5.3 U5.2 v27.8,31.64
P0_1
  Top 0.305: U1.40 229.99,34.67 229.99,37.33 R11.1
P0_4
  Top 0.305: U1.43 227.97,34.76 228.8,35.64 228.8,46.32 CRYSTAL.2 229.89,46.46 230.25,46.82 C8.1
P0_5
  Top 0.305: U1.44 227.62,35.12 228.06,35.56 228.06,44.23 227.05,45.34 227.05,46.45 CRYSTAL.1 227.04,48.75 C9.1
SAR_BY  (via drill 0.6)
  Top 0.305: U1.1 217.35,28.47 217.15,28.67 217.15,30.59 215.45,32.29 211.95,32.29 v211.9,32.34 | v219.8,6.38 221.4,6.38 C6.1 | v197.3,30.41 196.37,29.48 183.6,29.48 183.17,29.91 v183.17,30.19
  Bottom 0.305: v211.9,32.34 211.9,33.17 211.41,33.65 200.37,33.65 200.34,33.69 200.06,33.69 197.3,30.93 v197.3,30.41 | 219.7,6.3 v219.8,6.38 219.83,6.36 219.83,3.43 218.51,2.11 183.95,2.11 181.05,5.01 181.05,29.22 181.93,30.1 183.08,30.1 v183.17,30.19
SCL_S1  (via drill 0.6)
  Top 0.305: U1.2 218.48,28.09 217.78,27.39 216.35,27.39 216.07,27.66 216.07,29.04 215.59,29.52 v210.74,29.52 210.01,28.79 R8.2
  Bottom 0.305: v210.74,29.52 U2.5
SCL_S2
  Top 0.305: U1.51 218.59,39.96 201.36,39.96 201.24,39.84 201.21,39.84 195.85,34.48 185.56,34.48 184.65,35.39 184.65,36.84 181.94,39.55 181.94,39.93 SCL_S2_C2.TP
SCL_S2_U  (via drill 0.6)
  Top 1.016: SCL_S2_C2_C1.TP 165.54,39.98 v162.22,36.66 R10.2
  Bottom 0.406: U3.5 150.16,30.45 151.08,31.37 161.39,31.37 162.66,32.64 162.66,36.22 v162.22,36.66
SCL_S3
  Top 0.305: SCL_S3_C3.TP 194.48,18.27 196.06,16.69 214.13,16.69 U1.12
SCL_S3_U  (via drill 0.5)
  Top 0.813: R27.1 84.25,13.09 86.16,15 103.91,15 106.93,18.01 | 106.93,18.01 107.02,18.1 113.19,18.1 SCL_S3_C3_C2.TP | v100.21,23.89 101.05,23.89 106.93,18.01
  Bottom 0.813: U4.5 91.3,29.28 92.06,28.52 92.06,24.8 93.03,23.83 100.15,23.83 v100.21,23.89
SCL_S4
  Top 0.305: SCL_S4_C4.TP 181.71,34.5 183.28,32.92 197.3,32.92 199.71,35.33
  Top 0.32: 198.87,34.5 199.71,35.33 202.7,38.33 207.64,38.33 210.98,34.99 218.61,34.99 U1.58
SCL_S4_U  (via drill 0.5)
  Top 1.016: SCL.TP 66.6,52.33 68.23,50.85 68.23,42.72 69.91,41.12 94.35,41.05 98.95,36.41 98.93,30.2 v98.77,30.15 | v103.41,30.22 103.41,31.98 105.75,34.32 113.27,34.32 SCL_S4_C4_C2.TP
  Bottom 1.016: v98.77,30.15 103.34,30.15 v103.41,30.22
SCL_S4_U_1  (via drill 0.5)
  Top 1.016: R25.1 v4.77,31.04 4.77,32.77 SCL2.TP
  Bottom 0.305: U5.5 30.04,33.52 29.68,33.88 5.89,33.88 SCL2.TP 4.94,31.21 v4.77,31.04
SDA_S1  (via drill 0.6)
  Top 0.305: U1.3 218.79,27.76 217.32,26.27 v216.1,26.27 | R6.2 206.98,31.89 v207.54,32.49
  Bottom 0.305: 208.38,31.27 207.95,30.84 207.95,29.58 U2.4 | v216.1,26.27 216.1,30.08 214.91,31.27 208.38,31.27 | v207.54,32.49 207.72,32.51 207.86,32.31 207.84,31.8 208.38,31.27
SDA_S2
  Top 0.305: 218.71,39.13 U1.52 | SDA_S2_C1.TP 182.77,37.24 183.82,36.19 183.82,34.82 184.88,33.76 196.7,33.76 202.07,39.13
  Top 0.32: 202.07,39.13 218.71,39.13
SDA_S2_U  (via drill 0.6)
  Top 1.016: SDA_S2_C2_C2.TP 164.77,37.21 v160.41,32.89 159.69,33.56 159.69,44.23 R12.2
  Bottom 0.406: U3.4 149.41,31.03 150.54,32.17 159.66,32.17 v160.41,32.89
SDA_S3
  Top 0.305: SDA_S3_C1.TP 195.75,15.57 196.06,15.88 214.02,15.88 U1.13
SDA_S3_U  (via drill 0.5)
  Top 0.35: v92.06,31.32 92.06,24.92 93.34,23.64 98.31,23.64 v103.31,18.65
  Top 0.813: R26.1 87.98,12.07 89.14,13.23 105.19,13.23 v107.05,15.09 107.32,15.36 113.22,15.36 SDA_S3_C3_C4.TP
  Bottom 0.35: U4.4 88.24,30.54 89.14,31.44 91.94,31.44 v92.06,31.32 | v103.31,18.65 103.49,18.65 v107.05,15.09
SDA_S4
  Top 0.305: SDA_S4_C1.TP 182.57,31.83 182.94,32.2 200.55,32.2 201.83,33.48
  Top 0.32: 201.83,33.48 202.03,33.68 219.21,33.68 U1.59
SDA_S4_U  (via drill 0.5)
  Top 1.016: SDA.TP 65.4,49.3 66.77,47.99 66.77,41.41 69.03,39.14 92.6,39.14 97.06,34.68 97.06,29.63 v97.06,27.98 | v103.41,28.03 107.13,28.03 108.6,29.49 108.6,30.88 109.55,31.83 113.43,31.83 | 114.29,31.83 113.43,31.83 | 113.43,31.83 SDA_S4_C4_C4.TP
  Bottom 1.016: v97.06,27.98 v103.41,28.03
SDA_S4_U_1  (via drill 0.5)
  Top 1.016: R24.1 8.01,26.48 9.1,27.57 v9.1,32.55 9.1,35.11 8.55,35.67 4.88,35.67 SDA2.TP
  Bottom 0.305: U5.4 29.29,32.58 28.8,33.06 9.61,33.06 v9.1,32.55
SWDCLK  (via drill 0.6)
  Top 0.305: R2.2 200,50.91 v199.97,51.36 | 229,19.37 229,23.18 U1.21 | v226.24,18.32 227.95,18.32 229,19.37 | 229,19.37 229,19.34 228.73,19.07
  Bottom 0.305: v199.97,51.36 200.05,51.29 226.97,51.29 228.42,49.84 228.42,23.09 226.64,21.31 226.59,21.31 226.26,20.98 226.26,18.33 v226.24,18.32
SWDIO  (via drill 0.6)
  Top 0.305: R3.2 202.66,52.76 v202.76,52.86 | U1.20 228.37,23.11 228.37,20.37 227.88,19.89 v227.61,19.89
  Bottom 0.305: v202.76,52.86 227.68,52.86 229.66,50.88 229.69,21.87 v227.61,19.89
VCC_C2  (via drill 0.6)
  Top 2.184: 135.52,44.71 135.53,44.69 | 135.53,44.69 136.43,43.79 136.43,42.84 | VCC_C2_C3.TP 123.19,49.64 123.65,49.18 123.65,46.06 125.01,44.69 135.53,44.69
  Top 2.54: 170.78,47.53 v171.48,47.53 VCC_C2.TP | 136.43,42.84 v136.47,42.81 | v155.07,41.36 149.62,41.36 147.11,43.87
  Top 3.2: U$2.IN+ 149.46,54.06 147.11,51.71 147.11,43.87 147.11,42.22 145.11,40.21 138.34,40.21 136.47,42.09 v136.47,42.81
  Bottom 2.54: v171.48,47.53 171.43,47.47 171.43,42.53 170.94,42.04 170.94,41.87 169.53,40.46 162.34,40.46 161.61,39.73 VCC_2_C2.TP 156.67,39.76 v155.07,41.36 | v136.47,42.81 136.47,40.42 135.33,39.27
  Bottom 3.2: VCC_4_C2.TP 159.55,15.67 156.5,12.63 156.5,12.57 155.68,11.75 139.55,11.75 VCC_1_C2.TP 135.61,15.87 131.29,20.19 131.29,35.24 135.33,39.27 VCC_3_C2.TP
  pour Top (isolate 0.813): 120.89,0.4 174.15,0.36 174.33,10.3 172.91,10.36 173.34,45.68 174,45.55 174.09,55.49 120.84,55.46 121.09,46.03 122.21,45.99 122.56,9.88 120.72,9.77
VCC_C3  (via drill 0.6)
  Top 2.184: v111.71,45.89 111.71,49.57 | VCC.TP v101.33,49.5 v101.33,49.51
  Top 2.54: 111.71,49.57 VCC_C3.TP
  Bottom 2.184: v101.33,49.51 103.96,52.14 109.86,52.14 111.64,50.36 111.64,45.96 v111.71,45.89
  Bottom 3.2: v111.71,45.89 111.68,45.85 111.68,40.56 110.7,39.59 VCC_3_C3.TP 95.09,42.93 78.16,42.93 74.7,39.47 VCC_4_C3.TP 70.22,35.2 70.22,19.79 74.47,15.54 VCC_1_C3.TP 78.46,11.64 94.7,11.64 98.56,15.5 VCC_2_C3.TP
  pour Top (isolate 0.813): 58.95,0.21 112.27,0.2 112.04,10.41 114.55,10.3 114.77,45.03 112.82,45.05 112.58,55.08 58.69,55.24
VCC_C4  (via drill 0.6)
  Top 2.54: C2.+ 2.71,13.73 D1.C 2.82,16.33 3.44,16.95 14.67,16.95 v17.89,13.74 | VCC2.TP 37.26,52.96 42.32,47.91 42.32,37.39 v42.79,36.92 | BATTERY+.TP 33.95,7.05 32.91,8.08 32.91,11.7 v32.8,11.81
  Bottom 3.2: VCC_1_C4.TP v17.89,13.74 19.81,11.81 v32.8,11.81 35.32,11.81 39.64,16.13 VCC_2_C4.TP 42.79,19.46 v42.79,36.92 VCC_3_C4.TP | VCC_3_C4.TP | VCC_4_C4.TP 15.76,40.24 19.44,43.93 35.78,43.93 VCC_3_C4.TP
  pour Top (isolate 0.762): -0.02,0.75 55.02,0.37 55.05,55.2 0.1,55.26 -0.01,7.71
VCCC  (via drill 0.6)
  Top 2.184: C1.+ 225.62,12.98 v225.58,13.02
  Top 2.54: VCC_C1.TP 188.75,47.53 189.44,46.83 189.44,39.48 v191.64,37.28
  Bottom 1.676: DINA.2 226.82,4.03 227.54,4.75 228.19,4.75 228.93,5.49 228.93,11.03 226.98,12.98 225.62,12.98 v225.58,13.02
  Bottom 2.184: v225.58,13.02 225.58,13.21 223.16,15.62 218.09,15.62 VCC_1_C1.TP
  Bottom 3.2: VCC_1_C1.TP 216.68,15.77 213.48,12.57 196.96,12.57 VCC_2_C1.TP 190.46,19.08 190.46,36.1 v191.64,37.28 VCC_4_C1.TP 197.07,42.7 212.33,42.7 215.44,39.59 VCC_3_C1.TP
  pour Top (isolate 0.762): 180.28,54.99 180.39,44.88 178.34,45.06 178.51,10.52 180.09,10.49 180.31,0.14 233.17,0.03 233.17,55.02
VCCD
  Top 0.305: U1.48 226.08,36.53 225.4,37.21 225.4,39.74 C7.1
VDDA
  Top 0.305: 196.52,17.5 196.6,17.5 | 196.6,17.5 214.24,17.5 U1.11 221.67,24.95 221.72,24.95 223.13,26.37 223.13,31.88 U1.56 | VDDA_C1.TP 181.98,21.04 183.25,19.77 194.33,19.77 196.6,17.5
VDDA2  (via drill 0.6)
  Top 0.813: L1.2 161.14,8.39 163.52,8.39 164.34,9.2 164.34,12.36 166.35,14.37 v167.07,14.37 | v167.33,21.04 VDDA_C2.TP
  Bottom 0.813: v167.07,14.37 167.33,14.63 v167.33,21.04
VDDD  (via drill 0.6)
  Top 0.305: 181.28,53.14 VDDD_C1.TP 181.23,53.18 196.54,53.18 197.98,51.74 v197.98,45.09 | U1.50 220.95,38.32 218.1,41.17 218.1,44.29 v217.31,45.09
  Bottom 0.305: v217.31,45.09 v197.98,45.09
VDDD2
  Top 0.813: VDDD_C2.TP
  Top 1.27: L2.2 VDDD_C2.TP
VDDIO
  Top 0.27: 214.46,15.07 214.63,15.07 216.39,16.83 216.43,16.83 216.56,16.95 228.65,16.95 229.87,18.17 229.87,25.86 229.81,25.91
  Top 0.28: 186.33,14.66 196.15,14.66 196.56,15.07 214.46,15.07
  Top 0.305: U1.26 229.81,25.91 | VDDIO_C1.TP 179.47,13.01 184.68,13.01 186.33,14.66
VDDIO2
  Top 0.813: R15.2 165.31,5.43 165.92,6 165.88,11.84 167.08,12.93 171.17,12.93 VDDIO_C2.TP
XRES
  Top 0.305: U1.47 227.25,36.88 227.25,44.1 226.62,44.73 224,44.73 223.21,45.52 223.21,47.56 R14.2 C10.1 223.22,49.58 R1.2

## Text on the board
bNames: EMERGE FACE 4 | EMERGE FACE 3 | EMERGE FACE 2 | EMERGE FACE 1